# Altium PCB PCB_V2.PcbDoc
Units mm, origin at the board's own origin, x right, y up, seen from the top; angles counter-clockwise.
Board outline 152.4 x 101.6 mm, 2 copper layers (Top Layer, Bottom Layer); 94 components, 25 nets, 327 pads, 0 vias.
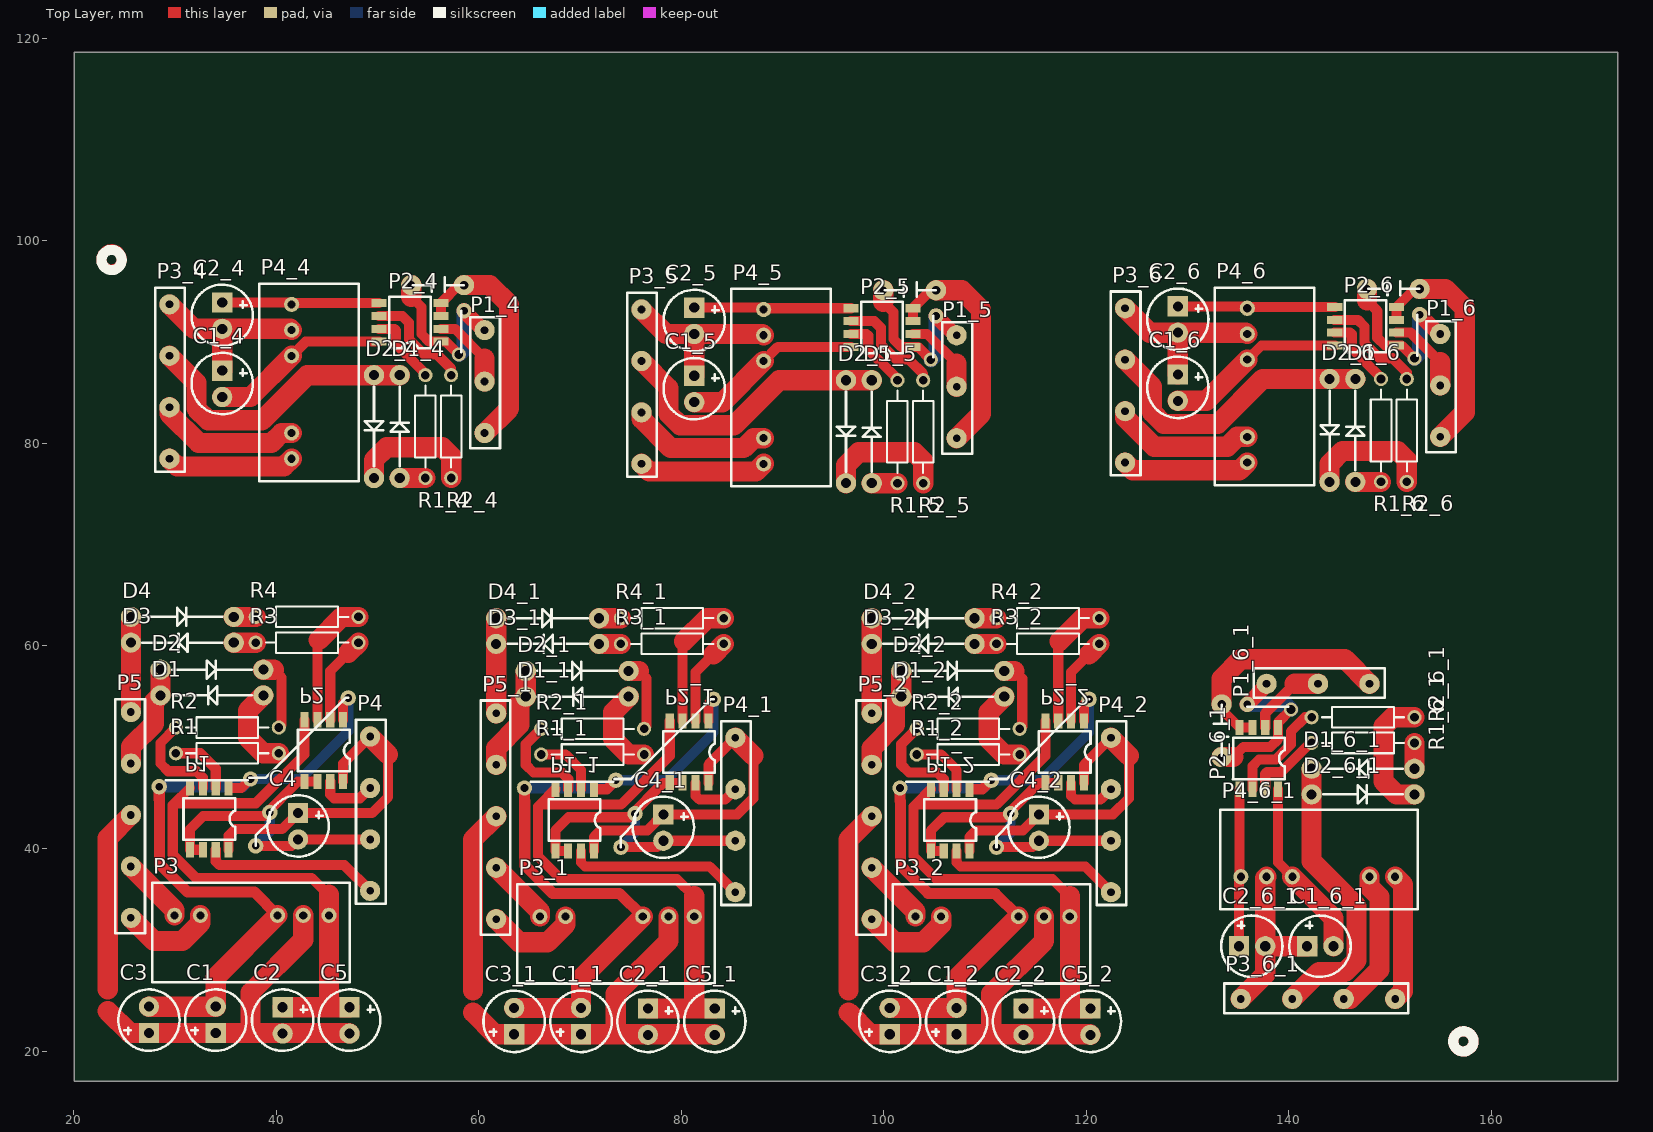
[diagram p0: Top Layer view]
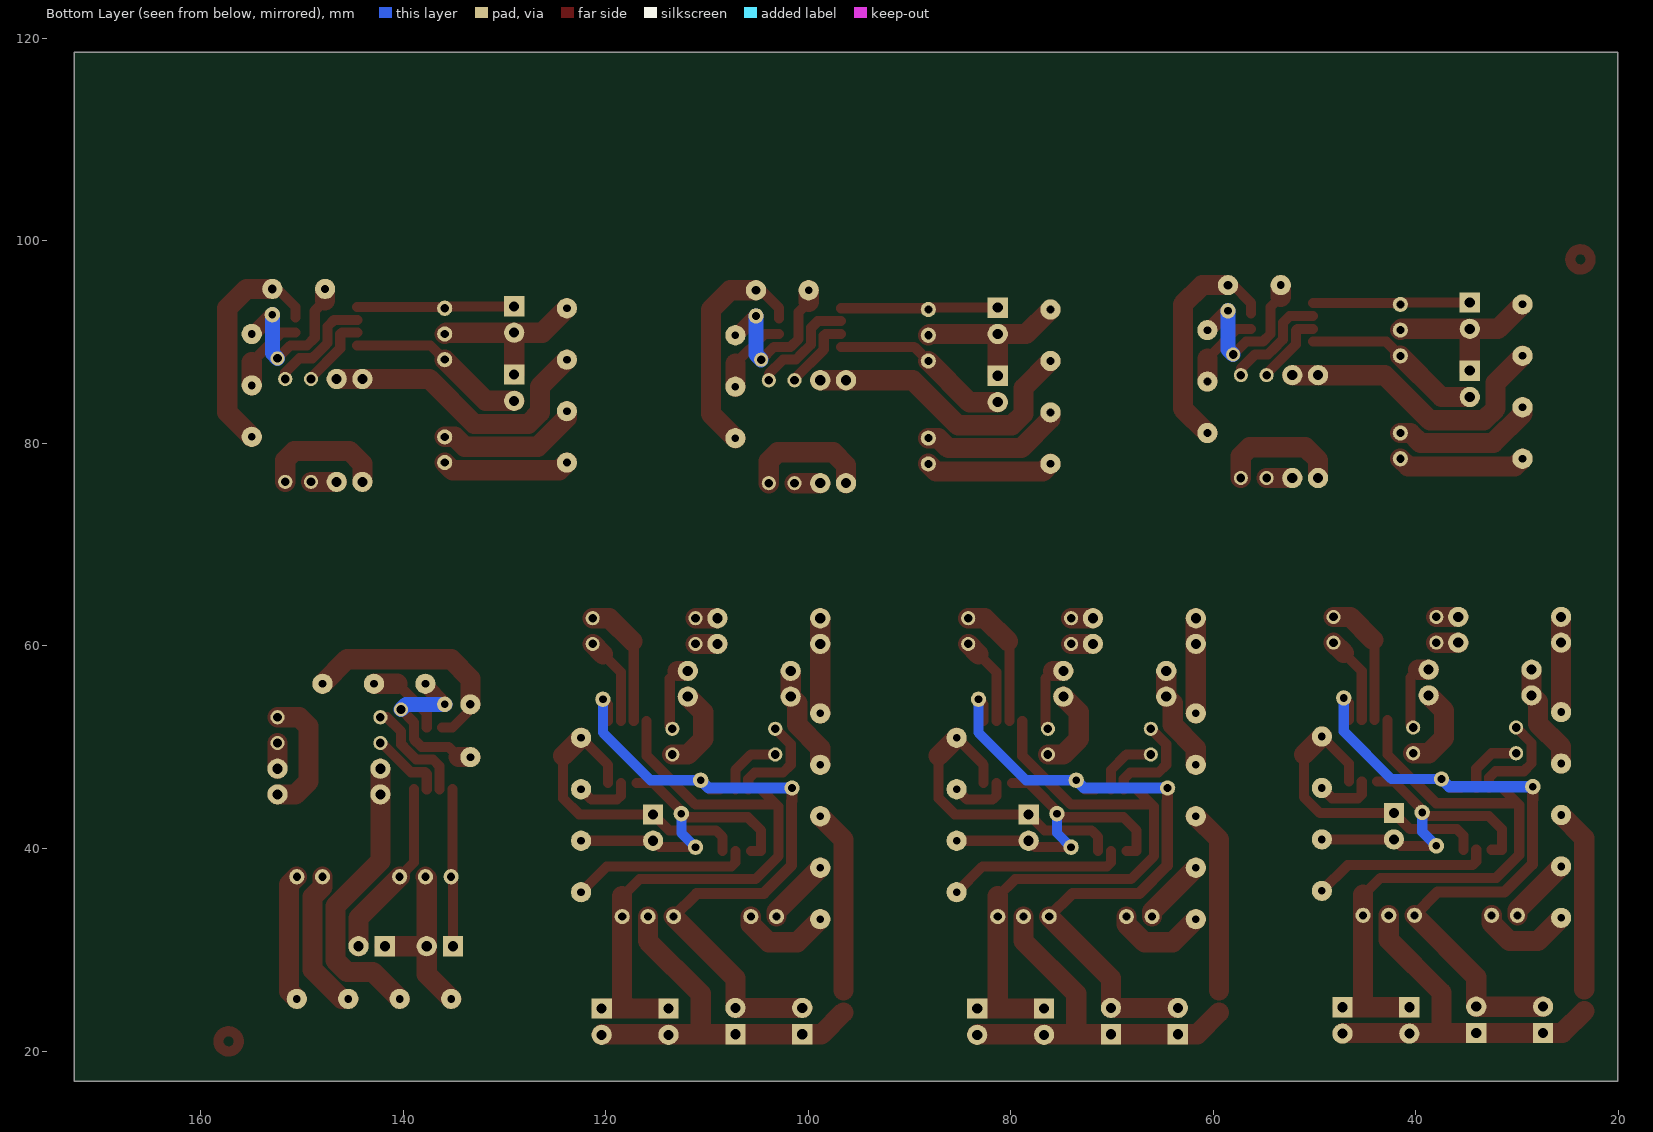
[diagram p1: Bottom Layer view, seen from below]

## Layer stack, top to bottom
Top Solder: solder mask 0.0102, Solder Resist, Dk 3.5
Top Layer: signal copper 0.0356
Dielectric 1: dielectric 0.32, FR-4, Dk 4.8
Bottom Layer: signal copper 0.0356
Bottom Solder: solder mask 0.0102, Solder Resist, Dk 3.5

## Board outline
20.066,17.018 172.466,17.018 172.466,118.618 20.066,118.618

## Design rules (kind name [scope] priority, off if disabled: settings)
Clearance [All] p1: gap=0.254 ignorepadtopadclearanceinfootprint=FALSE except(0: Arc-Hole Track-Hole SMDPad-Hole THPad-Hole Via-Hole Fill-Hole Poly-Hole Region-Hole Text-Hole)
PolygonConnect [All] p1: connectstyle=Relief reliefconductorwidth=0.254 reliefentries=4 polygonreliefangle="90 Angle" airgapwidth=0.254
RoutingVias [All] p1: holewidth=0.711 width=1.27 viastyle="Through Hole" minholewidth=0.711 minwidth=1.27 maxholewidth=0.711 maxwidth=1.27
SolderMaskExpansion [All] p1: expansion=0.102
Width [All] p1: maxlimit=5 minlimit=0.254 preferedwidth=0.254
30 further rules are at their usual default settings.

## Components (designator, comment, footprint, x,y, rotation, side; value= is the part's Value field where it differs from the comment)
C1 "Cap Pol1" C-10uF 34.036,21.784 r90 top value=1uF
C1_1 "Cap Pol1" C-10uF 70.104,21.657 r90 top value=1uF (schematic designator C1)
C1_2 "Cap Pol1" C-10uF 107.188,21.657 r90 top value=1uF (schematic designator C1)
C1_4 "Cap Pol1" C-10uF 34.671,87.182 r270 top value=1uF (schematic designator C1)
C1_5 "Cap Pol1" C-10uF 81.28,86.674 r270 top value=1uF (schematic designator C1)
C1_6 "Cap Pol1" C-10uF 129.032,86.801 r270 top value=1uF (schematic designator C1)
C1_6_1 "Cap Pol1" C-10uF 141.799,30.353 r0 top value=1uF (schematic designator C1)
C2 "Cap Pol1" C-10uF 40.64,24.324 r270 top value=1uF
C2_1 "Cap Pol1" C-10uF 76.708,24.197 r270 top value=1uF (schematic designator C2)
C2_2 "Cap Pol1" C-10uF 113.792,24.197 r270 top value=1uF (schematic designator C2)
C2_4 "Cap Pol1" C-10uF 34.671,93.913 r270 top value=1uF (schematic designator C2)
C2_5 "Cap Pol1" C-10uF 81.28,93.405 r270 top value=1uF (schematic designator C2)
C2_6 "Cap Pol1" C-10uF 129.032,93.532 r270 top value=1uF (schematic designator C2)
C2_6_1 "Cap Pol1" C-10uF 135.068,30.353 r0 top value=1uF (schematic designator C2)
C3 "Cap Pol1" C-10uF 27.432,21.784 r90 top value=1uF
C3_1 "Cap Pol1" C-10uF 63.5,21.657 r90 top value=1uF (schematic designator C3)
C3_2 "Cap Pol1" C-10uF 100.584,21.657 r90 top value=1uF (schematic designator C3)
C4 "Cap Pol1" C-10uF 42.164,43.494 r270 top value=1uF
C4_1 "Cap Pol1" C-10uF 78.232,43.367 r270 top value=1uF (schematic designator C4)
C4_2 "Cap Pol1" C-10uF 115.316,43.367 r270 top value=1uF (schematic designator C4)
C5 "Cap Pol1" C-10uF 47.244,24.324 r270 top value=1uF
C5_1 "Cap Pol1" C-10uF 83.312,24.197 r270 top value=1uF (schematic designator C5)
C5_2 "Cap Pol1" C-10uF 120.396,24.197 r270 top value=1uF (schematic designator C5)
D1 "D Schottky" Diode 38.735,55.118 r180 top
D1_1 "D Schottky" Diode 74.803,54.991 r180 top (schematic designator D1)
D1_2 "D Schottky" Diode 111.887,54.991 r180 top (schematic designator D1)
D1_4 "D Schottky" Diode 52.197,76.581 r90 top (schematic designator D1)
D1_5 "D Schottky" Diode 98.806,76.073 r90 top (schematic designator D1)
D1_6 "D Schottky" Diode 146.558,76.2 r90 top (schematic designator D1)
D1_6_1 "D Schottky" Diode 152.4,47.879 r180 top (schematic designator D1)
D2 "D Schottky" Diode 28.575,57.658 r0 top
D2_1 "D Schottky" Diode 64.643,57.531 r0 top (schematic designator D2)
D2_2 "D Schottky" Diode 101.727,57.531 r0 top (schematic designator D2)
D2_4 "D Schottky" Diode 49.657,86.741 r270 top (schematic designator D2)
D2_5 "D Schottky" Diode 96.266,86.233 r270 top (schematic designator D2)
D2_6 "D Schottky" Diode 144.018,86.36 r270 top (schematic designator D2)
D2_6_1 "D Schottky" Diode 142.24,45.339 r0 top (schematic designator D2)
D3 "D Schottky" Diode 35.814,60.325 r180 top
D3_1 "D Schottky" Diode 71.882,60.198 r180 top (schematic designator D3)
D3_2 "D Schottky" Diode 108.966,60.198 r180 top (schematic designator D3)
D4 "D Schottky" Diode 25.654,62.865 r0 top
D4_1 "D Schottky" Diode 61.722,62.738 r0 top (schematic designator D4)
D4_2 "D Schottky" Diode 98.806,62.738 r0 top (schematic designator D4)
P1 "1EDI60N12AF" sop-8#1 33.401,42.926 r180 top
P1_1 "1EDI60N12AF" sop-8#1 69.469,42.799 r180 top (schematic designator P1)
P1_2 "1EDI60N12AF" sop-8#1 106.553,42.799 r180 top (schematic designator P1)
P1_4 "Header 3" 3_DuanZi 60.579,91.186 r270 top (schematic designator P1)
P1_5 "Header 3" 3_DuanZi 107.188,90.678 r270 top (schematic designator P1)
P1_6 "Header 3" 3_DuanZi 154.94,90.805 r270 top (schematic designator P1)
P1_6_1 "Header 3" 3_DuanZi 137.795,56.261 r0 top (schematic designator P1)
P2 "1EDI60N12AF" sop-8#1 44.704,49.657 r180 top
P2_1 "1EDI60N12AF" sop-8#1 80.772,49.53 r180 top (schematic designator P2)
P2_2 "1EDI60N12AF" sop-8#1 117.856,49.53 r180 top (schematic designator P2)
P2_4 "1EDI60N12AF" sop-8#2 53.213,91.948 r90 top (schematic designator P2)
P2_5 "1EDI60N12AF" sop-8#2 99.822,91.44 r90 top (schematic designator P2)
P2_6 "1EDI60N12AF" sop-8#2 147.574,91.567 r90 top (schematic designator P2)
P2_6_1 "1EDI60N12AF" sop-8#2 137.033,48.895 r180 top (schematic designator P2)
P3 "DC/DC_Mokuai" DC/DC_MoKuai 29.972,33.401 r270 top
P3_1 "DC/DC_Mokuai" DC/DC_MoKuai 66.04,33.274 r270 top (schematic designator P3)
P3_2 "DC/DC_Mokuai" DC/DC_MoKuai 103.124,33.274 r270 top (schematic designator P3)
P3_4 "Header 4" 4_DuanZi 29.464,83.439 r90 top locked (schematic designator P3)
P3_5 "Header 4" 4_DuanZi 76.073,82.931 r90 top locked (schematic designator P3)
P3_6 "Header 4" 4_DuanZi 123.825,83.058 r90 top locked (schematic designator P3)
P3_6_1 "Header 4" 4_DuanZi 145.542,25.146 r180 top locked (schematic designator P3)
P4 "Header 4" 4_DuanZi 49.276,40.767 r90 top locked
P4_1 "Header 4" 4_DuanZi 85.344,40.64 r90 top locked (schematic designator P4)
P4_2 "Header 4" 4_DuanZi 122.428,40.64 r90 top locked (schematic designator P4)
P4_4 "DC/DC_Mokuai" DC/DC_MoKuai 41.529,78.486 r0 top (schematic designator P4)
P4_5 "DC/DC_Mokuai" DC/DC_MoKuai 88.138,77.978 r0 top (schematic designator P4)
P4_6 "DC/DC_Mokuai" DC/DC_MoKuai 135.89,78.105 r0 top (schematic designator P4)
P4_6_1 "DC/DC_Mokuai" DC/DC_MoKuai 150.495,37.211 r90 top (schematic designator P4)
P5 "Header 5" 5_DuanZi 25.527,48.133 r270 top locked
P5_1 "Header 5" 5_DuanZi 61.595,48.006 r270 top locked (schematic designator P5)
P5_2 "Header 5" 5_DuanZi 98.679,48.006 r270 top locked (schematic designator P5)
R1 "Res2" AXIAL-0.4 35.179,49.403 r0 top value=3.3
R1_1 "Res2" AXIAL-0.4 71.247,49.276 r0 top value=3.3 (schematic designator R1)
R1_2 "Res2" AXIAL-0.4 108.331,49.276 r0 top value=3.3 (schematic designator R1)
R1_4 "Res2" AXIAL-0.4 54.737,81.661 r270 top value=3.3 (schematic designator R1)
R1_5 "Res2" AXIAL-0.4 101.346,81.153 r270 top value=3.3 (schematic designator R1)
R1_6 "Res2" AXIAL-0.4 149.098,81.28 r270 top value=3.3 (schematic designator R1)
R1_6_1 "Res2" AXIAL-0.4 147.32,50.419 r0 top value=3.3 (schematic designator R1)
R2 "Res2" AXIAL-0.4 35.179,51.943 r0 top value=10
R2_1 "Res2" AXIAL-0.4 71.247,51.816 r0 top value=10 (schematic designator R2)
R2_2 "Res2" AXIAL-0.4 108.331,51.816 r0 top value=10 (schematic designator R2)
R2_4 "Res2" AXIAL-0.4 57.277,81.661 r270 top value=10 (schematic designator R2)
R2_5 "Res2" AXIAL-0.4 103.886,81.153 r270 top value=10 (schematic designator R2)
R2_6 "Res2" AXIAL-0.4 151.638,81.28 r270 top value=10 (schematic designator R2)
R2_6_1 "Res2" AXIAL-0.4 147.32,52.959 r0 top value=10 (schematic designator R2)
R3 "Res2" AXIAL-0.4 43.053,60.325 r180 top value=3.3
R3_1 "Res2" AXIAL-0.4 79.121,60.198 r180 top value=3.3 (schematic designator R3)
R3_2 "Res2" AXIAL-0.4 116.205,60.198 r180 top value=3.3 (schematic designator R3)
R4 "Res2" AXIAL-0.4 43.053,62.865 r180 top value=10
R4_1 "Res2" AXIAL-0.4 79.121,62.738 r180 top value=10 (schematic designator R4)
R4_2 "Res2" AXIAL-0.4 116.205,62.738 r180 top value=10 (schematic designator R4)

## Footprints (in the part's own frame and the unit in brackets; to place one, negate y for a bottom-side part, rotate by r counter-clockwise, add the part's x,y. Pads: shape width x height; smd on the part's side, far side on the other; paste and mask are expansions set on the pad)
3_DuanZi [mm]
  round 2 hole 0.762: 1(0,0) 2(5.08,0) 3(10.16,0)
  silkscreen extent -1.27,-1.4 11.68,1.52
4_DuanZi [mm]
  round 2 hole 0.762: 1(-4.953,0) 2(0.127,0) 3(5.207,0) 4(10.287,0)
  silkscreen extent -6.22,-1.52 11.94,1.4
5_DuanZi [mil]
  round 78.74 hole 30: 1(-210,5) 2(-10,5) 3(190,5) 4(390,5) 5(590,5)
  silkscreen extent -260,-55 650,60
AXIAL-0.4 [mm] "Axial Device, Thru-Hole; 2 Leads; 0.4 in Pin Spacing"
  round 1.4 hole 0.85: 1(-5.08,0) 2(5.08,0)
  silkscreen extent -4.06,-1.02 4.06,1.02
C-10uF [mm]
  rect 2x2 hole 1: 1(0,0)
  round 2 hole 1: 2(2.6,0)
  silkscreen extent -1.76,-3.03 4.3,3.03
DC/DC_MoKuai [mm]
  round 1.5 hole 0.8: 1(0,0) 2(0,2.54) 3(0,10.16) 4(0,12.7) 5(0,15.24)
  silkscreen extent -3.2,-2.23 6.6,17.27
Diode [mm]
  round 2 hole 1: 1(0,0) 2(10.16,0)
  silkscreen extent 1.14,-0.89 9.02,0.89
sop-8#1 [mm]
  rect 0.8x1.5 smd: 1(-1.905,3.048) 2(-0.635,3.048) 3(0.635,3.048) 4(1.905,3.048) 5(1.905,-3.048) 6(0.635,-3.048) 7(-0.635,-3.048) 8(-1.905,-3.048)
  silkscreen extent -2.55,-2.05 2.55,2.05
sop-8#2 [mm]
  rect 0.8x1.5 smd: 1(-1.905,-3.048) 2(-0.635,-3.048) 3(0.635,-3.048) 4(1.905,-3.048) 5(1.905,3.048) 6(0.635,3.048) 7(-0.635,3.048) 8(-1.905,3.048)
  silkscreen extent -2.55,-2.05 2.55,2.05

## Part data
C1 C1_1 C1_2 C1_4 C1_5 C1_6 C1_6_1 C2 C2_1 C2_2 C2_4 C2_5 C2_6 C2_6_1 C3 C3_1 C3_2 C4 C4_1 C4_2 C5 C5_1 C5_2: "Polarized Capacitor (Radial)", LatestRevisionDate=17-Jul-2002, LatestRevisionNote="Re-released for DXP Platform.", PackageDescription="Polarized Capacitor (Radial); 2 Leads", PackageReference=RB7.6-15, Published=8-Jun-2000, Publisher="Altium Limited"
D1 D1_1 D1_2 D1_4 D1_5 D1_6 D1_6_1 D2 D2_1 D2_2 D2_4 D2_5 D2_6 D2_6_1 D3 D3_1 D3_2 D4 D4_1 D4_2: "Schottky Diode", Code_JEDEC=DO-214-AA, LatestRevisionDate=17-Jul-2002, LatestRevisionNote="Re-released for DXP Platform.", PackageDescription="DO-214-AA/SMB; 2 C-Bend Leads; Body 5.3 x 3.6 mm, inc. leads (LxW)", PackageReference=SMB, Published=8-Jun-2000, Publisher="Altium Limited"
P1_4 P1_5 P1_6 P1_6_1: "Header, 3-Pin", LatestRevisionDate=17-Jul-2002, LatestRevisionNote="Re-released for DXP Platform.", Publisher="Altium Limited"
P3_4 P3_5 P3_6 P3_6_1 P4 P4_1 P4_2: "Header, 4-Pin", LatestRevisionDate=17-Jul-2002, LatestRevisionNote="Re-released for DXP Platform.", Publisher="Altium Limited"
P5 P5_1 P5_2: "Header, 5-Pin", LatestRevisionDate=17-Jul-2002, LatestRevisionNote="Re-released for DXP Platform.", Publisher="Altium Limited"
R1 R1_1 R1_2 R1_4 R1_5 R1_6 R1_6_1 R2 R2_1 R2_2 R2_4 R2_5 R2_6 R2_6_1 R3 R3_1 R3_2 R4 R4_1 R4_2: "Resistor", LatestRevisionDate=17-Jul-2002, LatestRevisionNote="Re-released for DXP Platform.", PackageDescription="Axial Device, Thru-Hole; 2 Leads; 0.4 in Pin Spacing", PackageReference=AXIAL-0.4, Published=8-Jun-2000, Publisher="Altium Limited"

## Free pads (board coordinates)
  round 1.524 hole 0.762: 2(47.117,54.864) 2(83.185,54.737) 2(120.269,54.737) 3(37.465,46.863) 3(73.533,46.736) 3(110.617,46.736) 4(39.37,43.561) 4(75.438,43.434) 4(112.522,43.434) 5(37.973,40.259) 5(74.041,40.132) 5(111.125,40.132) 6(28.448,46.101) 6(64.516,45.974) 6(101.6,45.974) 36(58.547,93.091) 36(105.156,92.583) 36(135.89,54.229) 36(152.908,92.71)
  round 2 hole 0.762: 34(53.34,95.631) 34(99.949,95.123) 34(133.35,49.022) 34(147.701,95.25)
  round 2 hole 0.85: 35(58.547,95.631) 35(105.156,95.123) 35(133.35,54.229) 35(152.908,95.25)
  round 1.4 hole 0.85: 37(58.039,88.773) 37(104.648,88.265) 37(140.208,53.721) 37(152.4,88.392)

## Nets (pads, with @x,y where several pads share a name; then routed paths per layer and width w, separated by ;. In a path a pad name is that pad's centre, name@x,y a point inside that pad or via, vN(x,y) a via of type N, cw(c..) or ccw(c..) an arc to the next point about the centre after c; other vN are vias at no path point)
5V: 
15V: 
15V2: 
20V2: 
-15V2: 
DSP_3.3V: 
DSP_5V: 
DSP_GND: 
DSP_PWM1: 
DSP_PWM2: 
DSP_PWM3: 
DSP_PWM4: 
GND: 
GND2: 
GS1: 
GS2: 
NetD3_1: 
PWM1: 
PWM2: 
PWM3: 
PWM4: 
VGND: 
Vin: 
VOUT1: 
VOUT2: 
pads on no net: C1.1 C1.2 C1_1.1 C1_1.2 C1_2.1 C1_2.2 C1_4.1 C1_4.2 C1_5.1 C1_5.2 C1_6.1 C1_6.2 C1_6_1.1 C1_6_1.2 C2.1 C2.2 C2_1.1 C2_1.2 C2_2.1 C2_2.2 C2_4.1 C2_4.2 C2_5.1 C2_5.2 C2_6.1 C2_6.2 C2_6_1.1 C2_6_1.2 C3.1 C3.2 C3_1.1 C3_1.2 C3_2.1 C3_2.2 C4.1 C4.2 C4_1.1 C4_1.2 C4_2.1 C4_2.2 C5.1 C5.2 C5_1.1 C5_1.2 C5_2.1 C5_2.2 D1.1 D1.2 D1_1.1 D1_1.2 D1_2.1 D1_2.2 D1_4.1 D1_4.2 D1_5.1 D1_5.2 D1_6.1 D1_6.2 D1_6_1.1 D1_6_1.2 D2.1 D2.2 D2_1.1 D2_1.2 D2_2.1 D2_2.2 D2_4.1 D2_4.2 D2_5.1 D2_5.2 D2_6.1 D2_6.2 D2_6_1.1 D2_6_1.2 D3.1 D3.2 D3_1.1 D3_1.2 D3_2.1 D3_2.2 D4.1 D4.2 D4_1.1 D4_1.2 D4_2.1 D4_2.2 P1.1 P1.2 P1.3 P1.4 P1.5 P1.6 P1.7 P1.8 P1_1.1 P1_1.2 P1_1.3 P1_1.4 P1_1.5 P1_1.6 P1_1.7 P1_1.8 P1_2.1 P1_2.2 P1_2.3 P1_2.4 P1_2.5 P1_2.6 P1_2.7 P1_2.8 P1_4.1 P1_4.2 P1_4.3 P1_5.1 P1_5.2 P1_5.3 P1_6.1 P1_6.2 P1_6.3 P1_6_1.1 P1_6_1.2 P1_6_1.3 P2.1 P2.2 P2.3 P2.4 P2.5 P2.6 P2.7 P2.8 P2_1.1 P2_1.2 P2_1.3 P2_1.4 P2_1.5 P2_1.6 P2_1.7 P2_1.8 P2_2.1 P2_2.2 P2_2.3 P2_2.4 P2_2.5 P2_2.6 P2_2.7 P2_2.8 P2_4.1 P2_4.2 P2_4.3 P2_4.4 P2_4.5 P2_4.6 P2_4.7 P2_4.8 P2_5.1 P2_5.2 P2_5.3 P2_5.4 P2_5.5 P2_5.6 P2_5.7 P2_5.8 P2_6.1 P2_6.2 P2_6.3 P2_6.4 P2_6.5 P2_6.6 P2_6.7 P2_6.8 P2_6_1.1 P2_6_1.2 P2_6_1.3 P2_6_1.4 P2_6_1.5 P2_6_1.6 P2_6_1.7 P2_6_1.8 P3.1 P3.2 P3.3 P3.4 P3.5 P3_1.1 P3_1.2 P3_1.3 P3_1.4 P3_1.5 P3_2.1 P3_2.2 P3_2.3 P3_2.4 P3_2.5 P3_4.1 P3_4.2 P3_4.3 P3_4.4 P3_5.1 P3_5.2 P3_5.3 P3_5.4 P3_6.1 P3_6.2 P3_6.3 P3_6.4 P3_6_1.1 P3_6_1.2 P3_6_1.3 P3_6_1.4 P4.1 P4.2 P4.3 P4.4 P4_1.1 P4_1.2 P4_1.3 P4_1.4 P4_2.1 P4_2.2 P4_2.3 P4_2.4 P4_4.1 P4_4.2 P4_4.3 P4_4.4 P4_4.5 P4_5.1 P4_5.2 P4_5.3 P4_5.4 P4_5.5 P4_6.1 P4_6.2 P4_6.3 P4_6.4 P4_6.5 P4_6_1.1 P4_6_1.2 P4_6_1.3 P4_6_1.4 P4_6_1.5 P5.1 P5.2 P5.3 P5.4 P5.5 P5_1.1 P5_1.2 P5_1.3 P5_1.4 P5_1.5 P5_2.1 P5_2.2 P5_2.3 P5_2.4 P5_2.5 R1.1 R1.2 R1_1.1 R1_1.2 R1_2.1 R1_2.2 R1_4.1 R1_4.2 R1_5.1 R1_5.2 R1_6.1 R1_6.2 R1_6_1.1 R1_6_1.2 R2.1 R2.2 R2_1.1 R2_1.2 R2_2.1 R2_2.2 R2_4.1 R2_4.2 R2_5.1 R2_5.2 R2_6.1 R2_6.2 R2_6_1.1 R2_6_1.2 R3.1 R3.2 R3_1.1 R3_1.2 R3_2.1 R3_2.2 R4.1 R4.2 R4_1.1 R4_1.2 R4_2.1 R4_2.2
copper on no net: | length 1859.9
  Top Layer w1: 28.448,44.841 28.484,44.806 ; 30.099,49.403 32.512,49.403 34.036,47.879 34.036,45.974 ; 30.099,51.943 28.575,50.419 28.575,48.387 29.337,47.625 32.131,47.625 32.766,46.99 32.766,45.974 ; 31.496,45.974 29.992,44.47 ; 32.512,39.878 31.496,39.878 31.496,41.91 32.802,43.216 38.771,43.216 42.164,46.609 42.799,46.609 43.815,46.609 ; 34.036,39.878 34.036,38.735 34.417,38.354 46.736,38.354 49.276,35.814 ; 34.671,93.913 41.342,93.913 41.529,93.726 41.656,93.853 50.165,93.853 ; 35.306,39.878 35.306,41.275 35.941,41.91 40.58,41.91 42.164,43.494 49.463,43.494 51.054,45.085 51.054,49.276 ; 35.56,45.974 36.576,45.974 37.465,46.863 ; 37.973,40.259 41.529,40.259 42.164,40.894 49.276,40.894 ; 39.751,57.658 40.513,56.896 40.513,52.197 40.259,51.943 ; 41.529,88.646 42.926,90.043 50.165,90.043 ; 42.799,52.705 42.799,49.276 37.993,44.47 29.992,44.47 ; 44.069,52.705 44.069,60.452 44.196,60.579 ; 45.222,35.433 45.163,35.433 43.496,37.1 32.058,37.1 29.788,39.37 29.788,44.266 29.992,44.47 ; 45.339,46.609 45.339,45.339 45.72,44.958 48.26,44.958 49.276,45.974 ; 45.339,52.705 45.339,57.531 47.117,59.309 ; 46.609,46.609 46.609,48.387 49.276,51.054 ; 46.609,52.705 46.609,54.356 47.117,54.864 ; 50.165,91.313 51.689,91.313 51.848,91.154 51.848,89.766 54.737,86.877 54.737,86.741 ; 50.165,92.583 52.451,92.583 53.102,91.932 53.102,90.286 53.258,90.13 53.259,90.13 53.994,89.395 53.994,89.394 54.599,88.789 55.864,88.789 57.277,87.376 57.277,86.995 ; 53.34,94.488 54.356,93.472 54.356,90.806 55.119,90.043 56.261,90.043 56.769,90.043 58.039,88.773 ; 56.261,91.313 57.658,91.313 60.579,88.392 ; 56.261,92.837 56.261,93.599 ; 56.261,93.853 58.039,95.631 58.547,95.631 ; 64.516,44.714 64.552,44.679 ; 66.167,49.276 68.58,49.276 70.104,47.752 70.104,45.847 ; 66.167,51.816 64.643,50.292 64.643,48.26 65.405,47.498 68.199,47.498 68.834,46.863 68.834,45.847 ; 67.564,45.847 66.06,44.343 ; 68.58,39.751 67.564,39.751 67.564,41.783 68.87,43.089 74.839,43.089 78.232,46.482 78.867,46.482 79.883,46.482 ; 70.104,39.751 70.104,38.608 70.485,38.227 82.804,38.227 85.344,35.687 ; 71.374,39.751 71.374,41.148 72.009,41.783 76.648,41.783 78.232,43.367 85.531,43.367 87.122,44.958 87.122,49.149 ; 71.628,45.847 72.644,45.847 73.533,46.736 ; 74.041,40.132 77.597,40.132 78.232,40.767 85.344,40.767 ; 75.819,57.531 76.581,56.769 76.581,52.07 76.327,51.816 ; 78.867,52.578 78.867,49.149 74.061,44.343 66.06,44.343 ; 80.137,52.578 80.137,60.325 80.264,60.452 ; 81.28,93.405 87.951,93.405 88.138,93.218 88.265,93.345 96.774,93.345 ; 81.29,35.306 81.231,35.306 79.564,36.973 68.126,36.973 65.856,39.243 65.856,44.139 66.06,44.343 ; 81.407,46.482 81.407,45.212 81.788,44.831 84.328,44.831 85.344,45.847 ; 81.407,52.578 81.407,57.404 83.185,59.182 ; 82.677,46.482 82.677,48.26 85.344,50.927 ; 82.677,52.578 82.677,54.229 83.185,54.737 ; 88.138,88.138 89.535,89.535 96.774,89.535 ; 96.774,90.805 98.298,90.805 98.457,90.646 98.457,89.258 101.346,86.369 101.346,86.233 ; 96.774,92.075 99.06,92.075 99.711,91.424 99.711,89.778 99.867,89.622 99.868,89.622 100.603,88.887 100.603,88.886 101.208,88.281 102.473,88.281 103.886,86.868 103.886,86.487 ; 99.949,93.98 100.965,92.964 100.965,90.298 101.728,89.535 102.87,89.535 103.378,89.535 104.648,88.265 ; 101.6,44.714 101.636,44.679 ; 102.87,90.805 104.267,90.805 107.188,87.884 ; 102.87,92.329 102.87,93.091 ; 102.87,93.345 104.648,95.123 105.156,95.123 ; 103.251,49.276 105.664,49.276 107.188,47.752 107.188,45.847 ; 103.251,51.816 101.727,50.292 101.727,48.26 102.489,47.498 105.283,47.498 105.918,46.863 105.918,45.847 ; 104.648,45.847 103.144,44.343 ; 105.664,39.751 104.648,39.751 104.648,41.783 105.954,43.089 111.923,43.089 115.316,46.482 115.951,46.482 116.967,46.482 ; 107.188,39.751 107.188,38.608 107.569,38.227 119.888,38.227 122.428,35.687 ; 108.458,39.751 108.458,41.148 109.093,41.783 113.732,41.783 115.316,43.367 122.615,43.367 124.206,44.958 124.206,49.149 ; 108.712,45.847 109.728,45.847 110.617,46.736 ; 111.125,40.132 114.681,40.132 115.316,40.767 122.428,40.767 ; 112.903,57.531 113.665,56.769 113.665,52.07 113.411,51.816 ; 115.951,52.578 115.951,49.149 111.145,44.343 103.144,44.343 ; 117.221,52.578 117.221,60.325 117.348,60.452 ; 118.374,35.306 118.315,35.306 116.648,36.973 105.21,36.973 102.94,39.243 102.94,44.139 103.144,44.343 ; 118.491,46.482 118.491,45.212 118.872,44.831 121.412,44.831 122.428,45.847 ; 118.491,52.578 118.491,57.404 120.269,59.182 ; 119.761,46.482 119.761,48.26 122.428,50.927 ; 119.761,52.578 119.761,54.229 120.269,54.737 ; 129.032,93.532 135.703,93.532 135.89,93.345 136.017,93.472 144.526,93.472 ; 133.35,54.229 133.35,53.721 135.128,51.943 ; 134.493,49.022 135.509,50.038 138.175,50.038 138.938,50.801 138.938,51.943 138.938,52.451 140.208,53.721 ; 135.068,30.353 135.068,37.024 135.255,37.211 135.128,37.338 135.128,45.847 ; 135.382,51.943 136.144,51.943 ; 135.89,88.265 137.287,89.662 144.526,89.662 ; 136.398,45.847 136.398,48.133 137.049,48.784 138.695,48.784 138.851,48.94 138.851,48.941 139.586,49.676 139.587,49.676 140.192,50.281 140.192,51.546 141.605,52.959 141.986,52.959 ; 137.668,45.847 137.668,47.371 137.827,47.53 139.215,47.53 142.104,50.419 142.24,50.419 ; 137.668,51.943 137.668,53.34 140.589,56.261 ; 138.938,45.847 138.938,38.608 140.335,37.211 ; 144.526,90.932 146.05,90.932 146.209,90.773 146.209,89.385 149.098,86.496 149.098,86.36 ; 144.526,92.202 146.812,92.202 147.463,91.551 147.463,89.905 147.619,89.749 147.62,89.749 148.355,89.014 148.355,89.013 148.96,88.408 150.225,88.408 151.638,86.995 151.638,86.614 ; 147.701,94.107 148.717,93.091 148.717,90.425 149.48,89.662 150.622,89.662 151.13,89.662 152.4,88.392 ; 150.622,90.932 152.019,90.932 154.94,88.011 ; 150.622,92.456 150.622,93.218 ; 150.622,93.472 152.4,95.25 152.908,95.25 ; 24.749,98.171 ccw(c23.749,98.171) 24.749,98.171 ; 158.226,20.955 ccw(c157.226,20.955) 158.226,20.955
  Top Layer w1.1: 28.448,44.841 28.448,46.101 ; 28.484,44.806 28.484,38.445 31.242,35.687 37.846,35.687 40.132,33.401 ; 64.516,44.714 64.516,45.974 ; 64.552,44.679 64.552,38.318 67.31,35.56 73.914,35.56 76.2,33.274 ; 101.6,44.714 101.6,45.974 ; 101.636,44.679 101.636,38.318 104.394,35.56 110.998,35.56 113.284,33.274
  Top Layer w1.5: 58.547,93.091 60.452,91.186 60.579,91.186 ; 105.156,92.583 107.061,90.678 107.188,90.678 ; 135.89,54.229 137.795,56.134 137.795,56.261 ; 152.908,92.71 154.813,90.805 154.94,90.805
  Top Layer w2: 23.368,23.943 25.527,21.784 27.432,21.784 34.036,21.784 37.465,21.784 ; 23.368,26.102 23.368,41.021 25.654,43.307 ; 25.654,33.147 27.94,30.861 30.734,30.861 32.512,32.639 32.512,33.401 ; 25.654,38.227 29.972,33.909 29.972,33.401 ; 25.654,48.387 25.654,50.038 27.94,52.324 27.94,54.483 28.575,55.118 28.575,57.531 ; 25.654,53.467 25.654,60.325 25.654,62.865 ; 27.432,24.384 34.036,24.384 34.036,27.305 40.132,33.401 ; 29.464,78.486 30.226,77.724 40.767,77.724 41.529,78.486 ; 29.464,83.566 29.464,82.918 32.34,80.042 39.542,80.042 40.526,81.026 41.529,81.026 ; 29.464,88.646 32.131,85.979 32.131,83.439 33.274,82.296 38.608,82.296 43.053,86.741 49.657,86.741 52.197,86.741 ; 29.464,93.726 31.877,91.313 34.671,91.313 ; 34.671,84.582 37.465,84.582 41.529,88.646 ; 34.671,87.182 34.671,91.313 ; 35.814,60.325 37.973,60.325 ; 35.814,62.865 37.973,62.865 ; 38.735,55.118 37.211,53.594 37.211,50.927 38.735,49.403 40.259,49.403 ; 38.735,57.658 39.751,57.658 ; 40.64,24.324 44.577,24.324 ; 41.529,91.186 41.402,91.313 34.671,91.313 ; 42.672,33.401 42.672,30.988 37.465,25.781 37.465,21.784 ; 44.196,60.579 46.482,62.865 48.133,62.865 ; 45.222,35.433 45.222,24.969 44.577,24.324 ; 47.117,59.309 48.133,60.325 ; 47.244,21.724 47.184,21.784 37.465,21.784 ; 47.244,24.324 44.577,24.324 ; 49.276,51.054 51.054,49.276 ; 49.657,76.581 49.657,78.359 50.927,79.629 56.388,79.629 57.277,78.74 57.277,76.581 ; 52.197,76.581 54.737,76.581 ; 53.34,94.488 53.34,95.631 ; 58.547,95.631 61.087,95.631 62.992,93.726 62.992,83.439 60.579,81.026 ; 59.436,23.816 61.595,21.657 63.5,21.657 70.104,21.657 73.533,21.657 ; 59.436,25.975 59.436,40.894 61.722,43.18 ; 60.579,86.106 60.579,88.392 ; 61.722,33.02 64.008,30.734 66.802,30.734 68.58,32.512 68.58,33.274 ; 61.722,38.1 66.04,33.782 66.04,33.274 ; 61.722,48.26 61.722,49.911 64.008,52.197 64.008,54.356 64.643,54.991 64.643,57.404 ; 61.722,53.34 61.722,60.198 61.722,62.738 ; 63.5,24.257 70.104,24.257 70.104,27.178 76.2,33.274 ; 71.882,60.198 74.041,60.198 ; 71.882,62.738 74.041,62.738 ; 74.803,54.991 73.279,53.467 73.279,50.8 74.803,49.276 76.327,49.276 ; 74.803,57.531 75.819,57.531 ; 76.073,77.978 76.835,77.216 87.376,77.216 88.138,77.978 ; 76.073,83.058 76.073,82.41 78.949,79.534 86.151,79.534 87.135,80.518 88.138,80.518 ; 76.073,88.138 78.74,85.471 78.74,82.931 79.883,81.788 85.217,81.788 89.662,86.233 96.266,86.233 98.806,86.233 ; 76.073,93.218 78.486,90.805 81.28,90.805 ; 76.708,24.197 80.645,24.197 ; 78.74,33.274 78.74,30.861 73.533,25.654 73.533,21.657 ; 80.264,60.452 82.55,62.738 84.201,62.738 ; 81.28,84.074 84.074,84.074 88.138,88.138 ; 81.28,86.674 81.28,90.805 ; 81.29,35.306 81.29,24.842 80.645,24.197 ; 83.185,59.182 84.201,60.198 ; 83.312,21.597 83.252,21.657 73.533,21.657 ; 83.312,24.197 80.645,24.197 ; 85.344,50.927 87.122,49.149 ; 88.138,90.678 88.011,90.805 81.28,90.805 ; 96.266,76.073 96.266,77.851 97.536,79.121 102.997,79.121 103.886,78.232 103.886,76.073 ; 96.52,23.816 98.679,21.657 100.584,21.657 107.188,21.657 110.617,21.657 ; 96.52,25.975 96.52,40.894 98.806,43.18 ; 98.806,33.02 101.092,30.734 103.886,30.734 105.664,32.512 105.664,33.274 ; 98.806,38.1 103.124,33.782 103.124,33.274 ; 98.806,48.26 98.806,49.911 101.092,52.197 101.092,54.356 101.727,54.991 101.727,57.404 ; 98.806,53.34 98.806,60.198 98.806,62.738 ; 98.806,76.073 101.346,76.073 ; 99.949,93.98 99.949,95.123 ; 100.584,24.257 107.188,24.257 107.188,27.178 113.284,33.274 ; 105.156,95.123 107.696,95.123 109.601,93.218 109.601,82.931 107.188,80.518 ; 107.188,85.598 107.188,87.884 ; 108.966,60.198 111.125,60.198 ; 108.966,62.738 111.125,62.738 ; 111.887,54.991 110.363,53.467 110.363,50.8 111.887,49.276 113.411,49.276 ; 111.887,57.531 112.903,57.531 ; 113.792,24.197 117.729,24.197 ; 115.824,33.274 115.824,30.861 110.617,25.654 110.617,21.657 ; 117.348,60.452 119.634,62.738 121.285,62.738 ; 118.374,35.306 118.374,24.842 117.729,24.197 ; 120.269,59.182 121.285,60.198 ; 120.396,21.597 120.336,21.657 110.617,21.657 ; 120.396,24.197 117.729,24.197 ; 122.428,50.927 124.206,49.149 ; 123.825,78.105 124.587,77.343 135.128,77.343 135.89,78.105 ; 123.825,83.185 123.825,82.537 126.701,79.661 133.903,79.661 134.887,80.645 135.89,80.645 ; 123.825,88.265 126.492,85.598 126.492,83.058 127.635,81.915 132.969,81.915 137.414,86.36 144.018,86.36 146.558,86.36 ; 123.825,93.345 126.238,90.932 129.032,90.932 ; 129.032,84.201 131.826,84.201 135.89,88.265 ; 129.032,86.801 129.032,90.932 ; 133.35,49.022 134.493,49.022 ; 133.35,54.229 133.35,56.769 135.255,58.674 145.542,58.674 147.955,56.261 ; 135.255,25.146 137.668,27.559 137.668,30.353 ; 135.89,90.805 135.763,90.932 129.032,90.932 ; 137.795,37.211 137.668,37.084 137.668,30.353 ; 140.335,25.146 143.002,27.813 145.542,27.813 146.685,28.956 146.685,34.29 142.24,38.735 142.24,45.339 142.24,47.879 ; 140.335,37.211 144.399,33.147 144.399,30.353 ; 140.589,56.261 142.875,56.261 ; 141.799,30.353 137.668,30.353 ; 144.018,76.2 144.018,77.978 145.288,79.248 150.749,79.248 151.638,78.359 151.638,76.2 ; 145.415,25.146 146.063,25.146 148.939,28.022 148.939,35.224 147.955,36.208 147.955,37.211 ; 146.558,76.2 149.098,76.2 ; 147.701,94.107 147.701,95.25 ; 150.495,25.146 151.257,25.908 151.257,36.449 150.495,37.211 ; 152.4,45.339 150.622,45.339 149.352,46.609 149.352,52.07 150.241,52.959 152.4,52.959 ; 152.4,47.879 152.4,50.419 ; 152.908,95.25 155.448,95.25 157.353,93.345 157.353,83.058 154.94,80.645 ; 154.94,85.725 154.94,88.011
  Bottom Layer w1: 37.465,46.863 42.418,46.863 47.117,51.562 47.117,54.864 ; 37.973,40.259 39.37,41.656 39.37,43.561 ; 73.533,46.736 78.486,46.736 83.185,51.435 83.185,54.737 ; 74.041,40.132 75.438,41.529 75.438,43.434 ; 110.617,46.736 115.57,46.736 120.269,51.435 120.269,54.737 ; 111.125,40.132 112.522,41.529 112.522,43.434
  Bottom Layer w1.1: 28.448,46.101 36.703,46.101 37.465,46.863 ; 64.516,45.974 72.771,45.974 73.533,46.736 ; 101.6,45.974 109.855,45.974 110.617,46.736
  Bottom Layer w1.5: 58.039,88.773 58.547,89.281 58.547,93.091 ; 104.648,88.265 105.156,88.773 105.156,92.583 ; 135.89,54.229 139.7,54.229 140.208,53.721 ; 152.4,88.392 152.908,88.9 152.908,92.71

## Silkscreen, mask and mechanical layers (free items; w line width, h text height)
Top Overlay:
  circle w1: c23.749,98.111 r1
  circle w1: c157.226,20.955 r1
  lines w0.254: 29.083,46.736 37.211,46.736 ; 37.338,46.99 38.989,46.99 46.863,54.864 47.117,54.864 ; 37.973,40.259 37.973,41.275 39.37,42.672 39.37,43.561 ; 53.467,95.631 54.864,95.631 55.372,95.631 ; 55.372,94.996 55.372,96.393 ; 56.642,94.996 56.642,96.393 ; 56.769,95.631 58.507,95.631 ; 58.293,89.027 58.293,93.091 ; 65.151,46.609 73.279,46.609 ; 73.406,46.863 75.057,46.863 82.931,54.737 83.185,54.737 ; 74.041,40.132 74.041,41.148 75.438,42.545 75.438,43.434 ; 100.076,95.123 101.473,95.123 101.981,95.123 ; 101.981,94.488 101.981,95.885 ; 102.235,46.609 110.363,46.609 ; 103.251,94.488 103.251,95.885 ; 103.378,95.123 105.116,95.123 ; 104.902,88.519 104.902,92.583 ; 110.49,46.863 112.141,46.863 120.015,54.737 120.269,54.737 ; 111.125,40.132 111.125,41.148 112.522,42.545 112.522,43.434 ; 132.588,51.054 133.985,51.054 ; 132.588,52.324 133.985,52.324 ; 133.35,49.149 133.35,50.546 133.35,51.054 ; 133.35,52.451 133.35,54.189 ; 135.89,53.975 139.954,53.975 ; 147.828,95.25 149.225,95.25 149.733,95.25 ; 149.733,94.615 149.733,96.012 ; 151.003,94.615 151.003,96.012 ; 151.13,95.25 152.868,95.25 ; 152.654,88.646 152.654,92.71